# Altium PCB Radio_batt_testboard.PcbDoc
Units mil, origin at the board's own origin, x right, y up, seen from the top; angles counter-clockwise.
Board outline 6000.09 x 4000.19 mil, 2 copper layers (Top Layer, Bottom Layer); 55 components, 264 nets, 429 pads, 143 vias.
Unrouted connection lines stored in the file: 17.
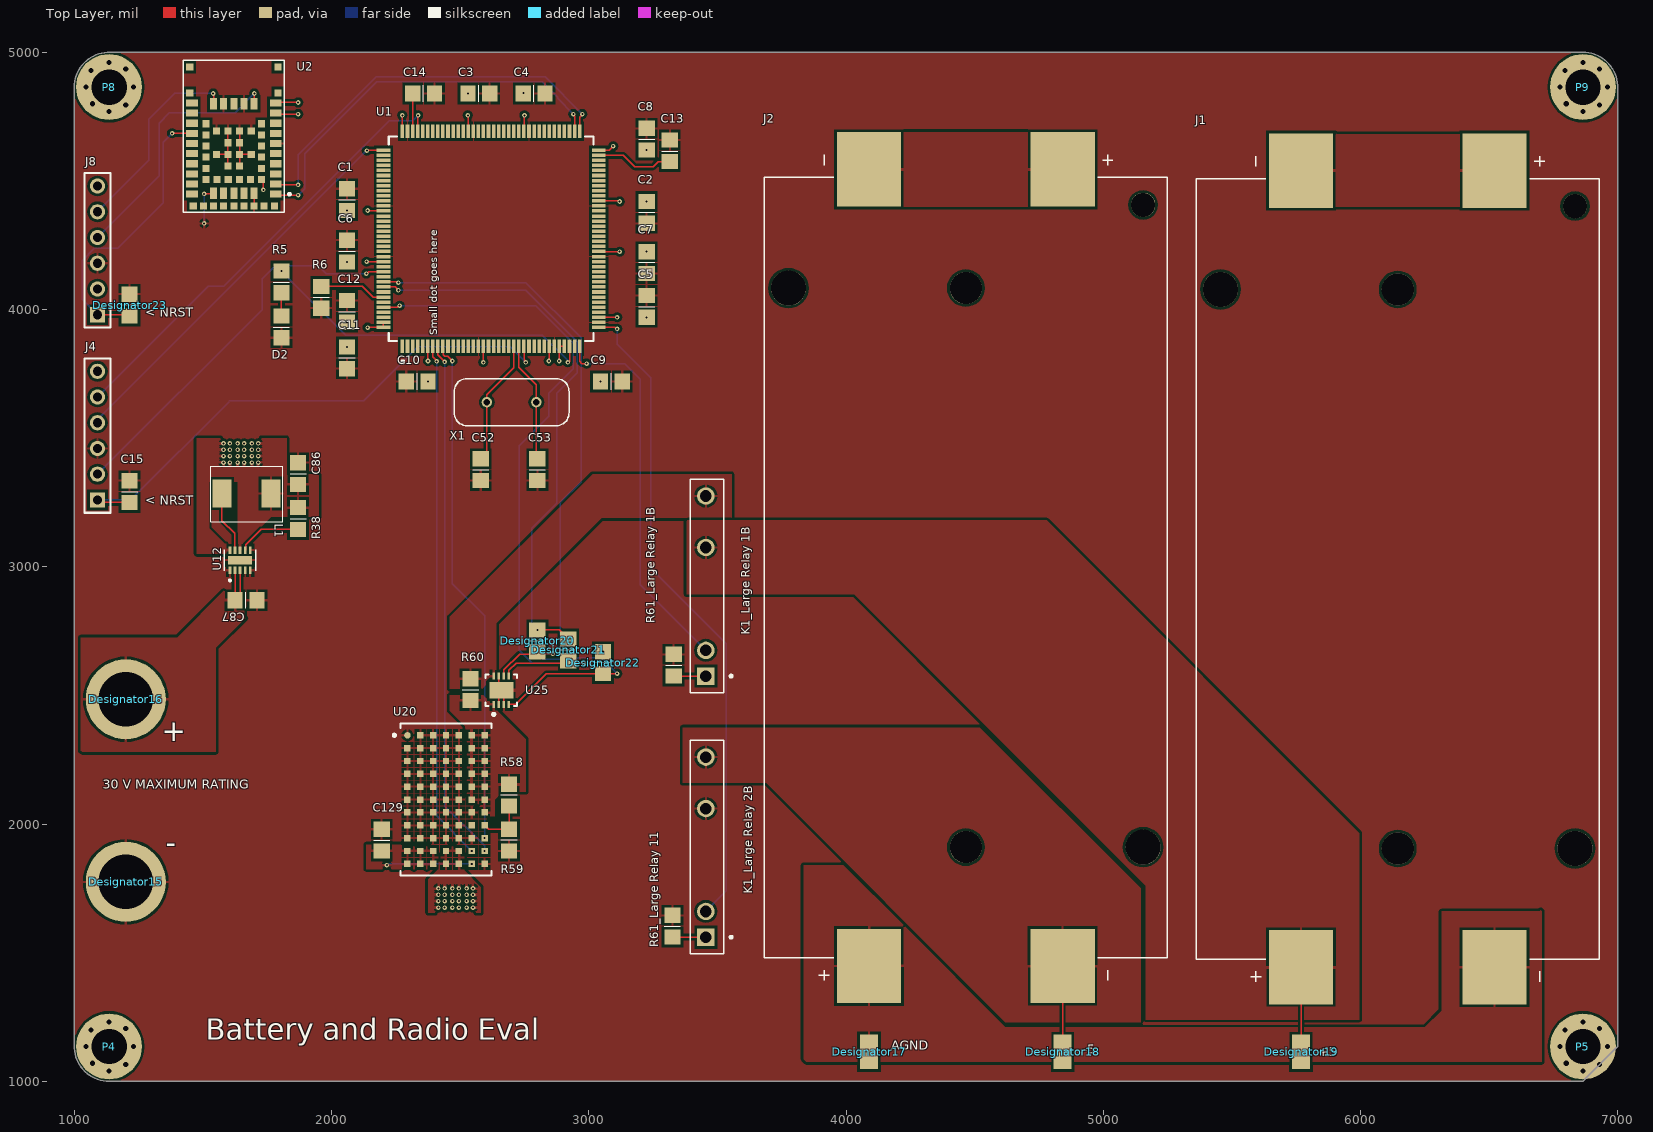
[diagram p0: Top Layer view]
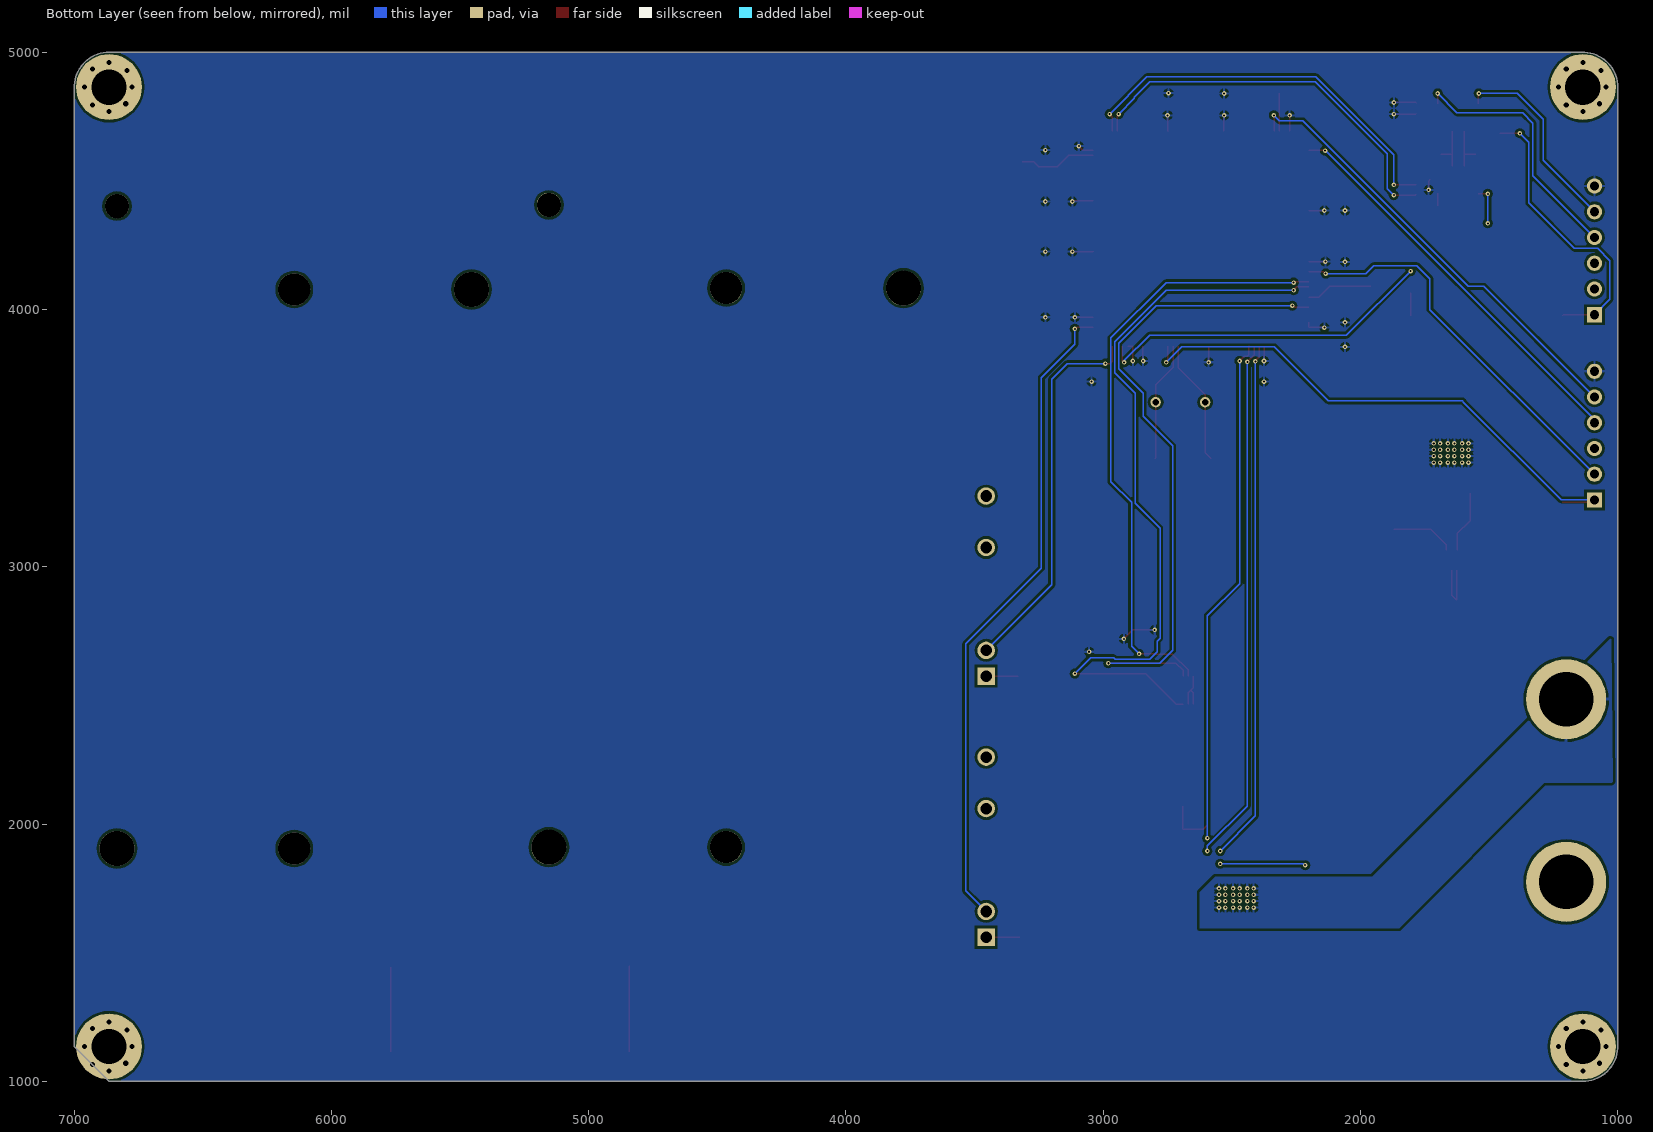
[diagram p1: Bottom Layer view, seen from below]
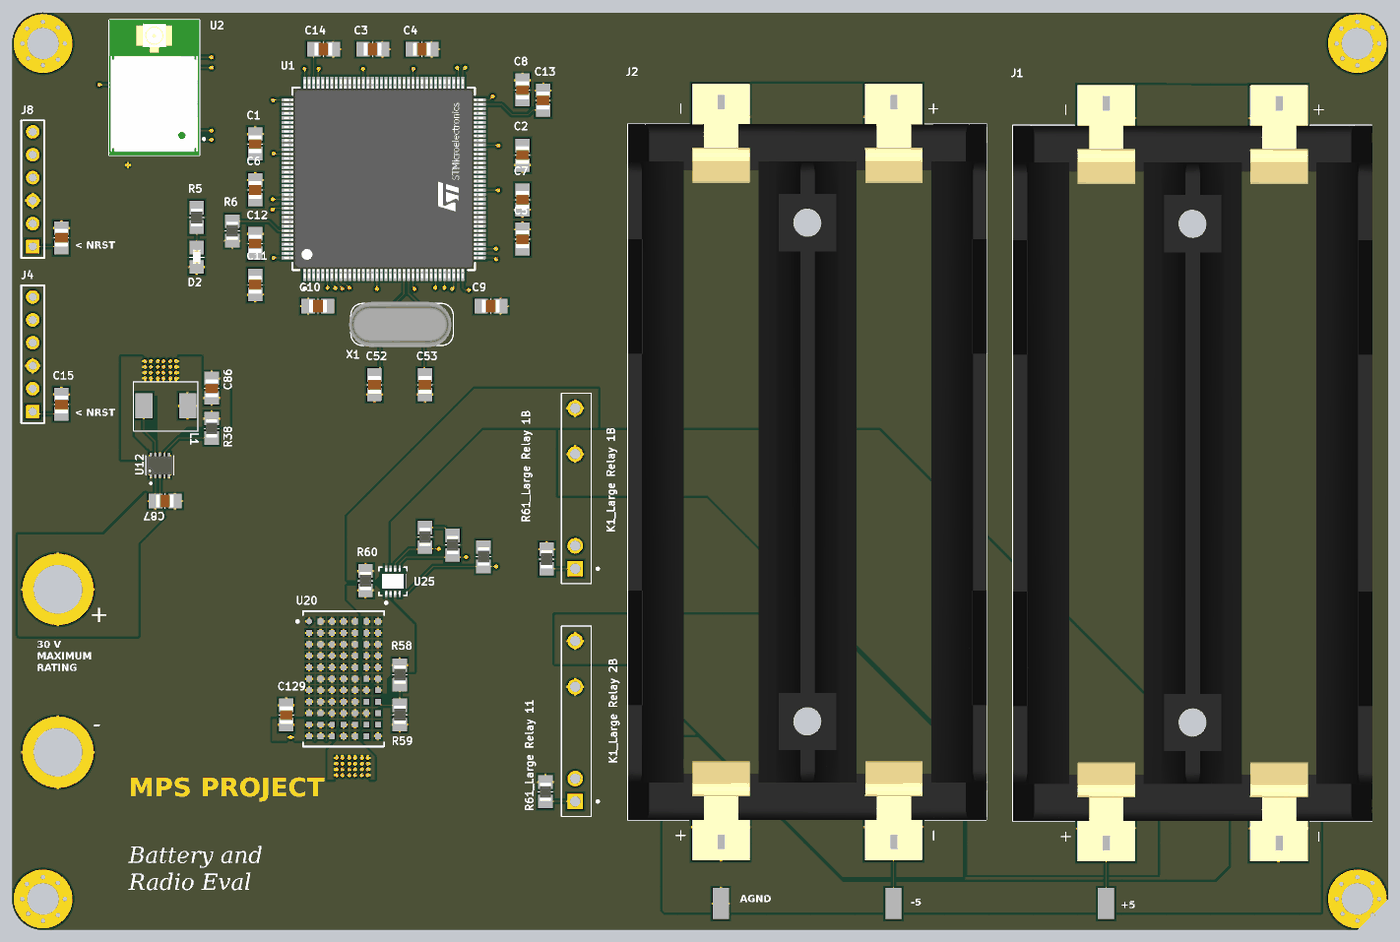
[diagram p2: 3D render of the assembled board from above, using the file's embedded part models]

## Layer stack, top to bottom
Top Solder: solder mask 0.4, Solder Resist, Dk 3.5
Top Layer: signal copper 1.4
Dielectric 1: dielectric 12.6, FR-4, Dk 4.8
Bottom Layer: signal copper 1.4
Bottom Solder: solder mask 0.4, Solder Resist, Dk 3.5

## Board outline
1135,999.91 cw(c1135,1135) 1000,1140 1000,4864.91 999.91,4865 cw(c1135,4865) 1140,5000 6864.91,5000 6865,5000.09 cw(c6865,4865) 7000,4860 7000,1135.09 6864.91,1000

## Design rules (kind name [scope] priority, off if disabled: settings)
Clearance [All] p1: gap=10 ignorepadtopadclearanceinfootprint=TRUE except(0: Arc-Hole Track-Hole SMDPad-Hole THPad-Hole Via-Hole Fill-Hole Poly-Hole Region-Hole Text-Hole)
PolygonConnect [All] p1: connectstyle=Relief reliefconductorwidth=10 reliefentries=4 polygonreliefangle="90 Angle" airgapwidth=10
RoutingVias [All] p1: holewidth=28 width=50 viastyle="Through Hole" minholewidth=28 minwidth=50 maxholewidth=28 maxwidth=50
SolderMaskExpansion [All] p1: expansion=4 istentingtop=FALSE
Width [All] p1: maxlimit=10 minlimit=5 preferedwidth=5
30 further rules are at their usual default settings.

## Classes and differential pairs
channel class voltagesource: OPA5481 OPA5482
channel class Small_Relay: "Small Relay 1" "Small Relay 21" "Small Relay 22"
channel class mixer: MIXER1 MIXER2
channel class low_pass: LP1 LP2
channel class LO: LO1 LO2
channel class Large_Relay: "Large Relay 2" "Large Relay 11" "Large Relay 12" "Large Relay 13"
channel class ina: INA LO1_INA1 LO1_INA2 LO2_INA1 LO2_INA2
channel class high_pass: HP HP2
channel class dcshift: DC1 dcshift1 dcshift2
channel class amp: AMP1 AMP2
component class ZIF_Bridge: J J5
component class ZIF_Bridge_4: J6 J7
component class "uBlox Radio": J8 U2
component class top_level: J1 J2
component class "Small Relay 22": "K2_Small Relay 22"
component class "Small Relay 21": "K2_Small Relay 21"
component class "Small Relay 1": "K2_Small Relay 1"
component class MECH: P4 P5 P8 P9
component class MCU: C1 C2 C3 C4 C5 C6 C7 C8 C9 C10 C11 C12 C13 C14 C15 C52 C53 D2 J4 R5 R6 U1 X1
component class LP: U22
component class LP2: U21
component class "Large Relay 13": "K1_Large Relay 13"
component class "Large Relay 12": "K1_Large Relay 12"
component class "Large Relay 11": "K1_Large Relay 11" "R61_Large Relay 11"
component class Batt_charger: C129 R58 R59 R60 U20 U25
component class 3v3_Regulator: C86 C87 L1 R38 U12
component class -5v_Regulator: U18

## Components (designator, comment, footprint, x,y, rotation, side; value= is the part's Value field where it differs from the comment)
C1 "0.1uF" STD_0805_C 2060,4469.65 r270 top value=.01uf
C2 "0.1uF" STD_0805_C 3225,4335.35 r90 top value=.01uf
C3 "0.1uF" STD_0805_C 2614.65,4840 r180 top value=.01uf
C4 "0.1uF" STD_0805_C 2829.65,4840 r180 top value=.01uf
C5 "0.1uF" STD_0805_C 3225,4054.65 r270 top value=.01uf
C6 "0.1uF" STD_0805_C 2060,4269.65 r270 top value=.01uf
C7 "0.1uF" STD_0805_C 3225,4140.35 r90 top value=.01uf
C8 "0.1uF" STD_0805_C 3225,4704.65 r270 top value=.01uf
C9 "0.1uF" STD_0805_C 3130,3720 r180 top value=.01uf
C10 "0.1uF" STD_0805_C 2290.35,3720 r0 top value=.01uf
C11 "0.1uF" STD_0805_C 2060,3770 r90 top value=.01uf
C12 "0.1uF" STD_0805_C 2060,4035 r270 top value=.01uf
C13 "4.7uF" STD_0805_C 3315,4659.65 r270 top value=.01uf
C14 "4.7uF" STD_0805_C 2400,4840 r180 top value=.01uf
C15 "1uF" STD_0805_C 1215,3334.65 r270 top value=.01uf
C52 "33pF" STD_0805_C 2580,3419.65 r270 top value=.01uf
C53 "33pF" STD_0805_C 2800,3419.65 r270 top value=.01uf
C86 "22uF" STD_0805_C 1870,3404.65 r270 top value=.01uf
C87 "22uF" STD_0805_C 1709.65,2870 r180 top value=.01uf
C129 "4.7uF" STD_0805_C 2195,1979.65 r270 top value=.01uf
D2 "LED" STD_LED 1805,3975 r270 top
Designator15 "Comment" 575-4 1200,1775 r0 top
Designator16 "Comment" 575-4 1200,2485 r0 top
Designator17 "Comment" 5017 4089.65,1115 r90 top
Designator18 "Comment" 5017 4842.01,1115 r90 top
Designator19 "Comment" 5017 5768.82,1115 r90 top
Designator20 "Comment" STD_0805_R 2800,2670 r90 top
Designator21 "Comment" STD_0805_R 2920,2635 r90 top
Designator22 "Comment" STD_0805_R 3055,2585 r90 top
Designator23 "Comment" STD_0805_C 1215,3975 r90 top
J1 "Batt Holder" SMD_Batteryholder 6145,2991.61 r90 top
J2 "Batt Holder" SMD_Batteryholder 4465.83,2996.61 r90 top
J4 "665306124022" HDR1X6 1090,3260 r90 top
J8 "665306124022" HDR1X6 1090,3980 r90 top
"K1_Large Relay 1B" "CPC1706Y" RELAY_CPC1706Y 3455,2575 r90 top (schematic designator K1)
"K1_Large Relay 2B" "CPC1706Y" RELAY_CPC1706Y 3455,1560 r90 top (schematic designator K1)
L1 "10uH" IHLP2020BZER100M01 1669.51,3285 r0 top
P4 "M3 Mounting Hole" MH-M3 1135,1135 r0 top
P5 "M3 Mounting Hole" MH-M3 6865,1135 r0 top
P8 "M3 Mounting Hole" MH-M3 1135,4865 r0 top
P9 "M3 Mounting Hole" MH-M3 6865,4865 r0 top
R5 "330" STD_0805_R 1805,4149.65 r270 top value=1K
R6 "10K" STD_0805_R 1960,4005.35 r90 top value=1K
R38 "100K" STD_0805_R 1870,3230 r270 top value=1K
R58 "1.24M" STD_0805_R 2690,2070 r90 top value=1K
R59 "312K" STD_0805_R 2690,1895 r90 top value=1K
R60 "50m" STD_0805_R 2540,2565 r270 top value=1K
"R61_Large Relay 1B" "360" STD_0805_R 3330,2659.65 r270 top value=1K (schematic designator R61)
"R61_Large Relay 11" "360" STD_0805_R 3325,1645 r270 top value=1K (schematic designator R61)
U1 "STM32F767ZIT6" FP-LQFP144-1A-MFG 2620,4275 r90 top
U2 "NINA-B400" NINA_LGA71R_1500X1000X223_UFL 1620,4673.03 r90 top
U12 "TPS62177DQCT" TPS62177 1644.37,3025.83 r90 top
U20 "LTM8062EV#PBF" LT-LGA-77-05-08-1856_V 2445,2095 r0 top
U25 "LTC2944IDD#PBF" FP-DD-8-05-08-1698-MFG 2660,2520 r90 top
X1 "8MHz 10ppm" XTAL_ECS-160-20-4X 2700,3640 r180 top

## Footprints (in the part's own frame and the unit in brackets; to place one, negate y for a bottom-side part, rotate by r counter-clockwise, add the part's x,y. Pads: shape width x height; smd on the part's side, far side on the other; paste and mask are expansions set on the pad)
575-4 [mm]
  round 7.9 hole 5.4: 1(0,0)
5017 [mil] "KEYSTONE TP GOLD"
  rect 135x70 smd: 1(0,0)
  body extent -60,-30 60,30, height 60
FP-DD-8-05-08-1698-MFG [mm]
  rect 0.7x0.25 smd paste+0 mask+0: 1(-1.4,0.75) 2(-1.4,0.25) 3(-1.4,-0.25) 4(-1.4,-0.75) 5(1.4,-0.75) 6(1.4,-0.25) 7(1.4,0.25) 8(1.4,0.75)
  rect 1.65x2.38 smd paste+0 mask+0: 9(0,0)
  silkscreen extent -2.5,-1.55 1.55,1.55, body extent -1.85,-1.65 1.85,1.65, height 0.25
FP-LQFP144-1A-MFG [mm]
  rect 1.35x0.35 smd paste+0 mask+0: 1(-10.625,8.75) 2(-10.625,8.25) 3(-10.625,7.75) 4(-10.625,7.25) 5(-10.625,6.75) 6(-10.625,6.25) 7(-10.625,5.75) 8(-10.625,5.25) 9(-10.625,4.75) 10(-10.625,4.25) 11(-10.625,3.75) 12(-10.625,3.25) 13(-10.625,2.75) 14(-10.625,2.25) 15(-10.625,1.75) 16(-10.625,1.25) 17(-10.625,0.75) 18(-10.625,0.25) 19(-10.625,-0.25) 20(-10.625,-0.75) 21(-10.625,-1.25) 22(-10.625,-1.75) 23(-10.625,-2.25) 24(-10.625,-2.75) 25(-10.625,-3.25) 26(-10.625,-3.75) 27(-10.625,-4.25) 28(-10.625,-4.75) 29(-10.625,-5.25) 30(-10.625,-5.75) 31(-10.625,-6.25) 32(-10.625,-6.75) 33(-10.625,-7.25) 34(-10.625,-7.75) 35(-10.625,-8.25) 36(-10.625,-8.75) 73(10.625,-8.75) 74(10.625,-8.25) 75(10.625,-7.75) 76(10.625,-7.25) 77(10.625,-6.75) 78(10.625,-6.25) 79(10.625,-5.75) 80(10.625,-5.25) 81(10.625,-4.75) 82(10.625,-4.25) 83(10.625,-3.75) 84(10.625,-3.25) 85(10.625,-2.75) 86(10.625,-2.25) 87(10.625,-1.75) 88(10.625,-1.25) 89(10.625,-0.75) 90(10.625,-0.25) 91(10.625,0.25) 92(10.625,0.75) 93(10.625,1.25) 94(10.625,1.75) 95(10.625,2.25) 96(10.625,2.75) 97(10.625,3.25) 98(10.625,3.75) 99(10.625,4.25) 100(10.625,4.75) 101(10.625,5.25) 102(10.625,5.75) 103(10.625,6.25) 104(10.625,6.75) 105(10.625,7.25) 106(10.625,7.75) 107(10.625,8.25) 108(10.625,8.75)
  rect 0.35x1.35 smd paste+0 mask+0: 37(-8.75,-10.625) 38(-8.25,-10.625) 39(-7.75,-10.625) 40(-7.25,-10.625) 41(-6.75,-10.625) 42(-6.25,-10.625) 43(-5.75,-10.625) 44(-5.25,-10.625) 45(-4.75,-10.625) 46(-4.25,-10.625) 47(-3.75,-10.625) 48(-3.25,-10.625) 49(-2.75,-10.625) 50(-2.25,-10.625) 51(-1.75,-10.625) 52(-1.25,-10.625) 53(-0.75,-10.625) 54(-0.25,-10.625) 55(0.25,-10.625) 56(0.75,-10.625) 57(1.25,-10.625) 58(1.75,-10.625) 59(2.25,-10.625) 60(2.75,-10.625) 61(3.25,-10.625) 62(3.75,-10.625) 63(4.25,-10.625) 64(4.75,-10.625) 65(5.25,-10.625) 66(5.75,-10.625) 67(6.25,-10.625) 68(6.75,-10.625) 69(7.25,-10.625) 70(7.75,-10.625) 71(8.25,-10.625) 72(8.75,-10.625) 109(8.75,10.625) 110(8.25,10.625) 111(7.75,10.625) 112(7.25,10.625) 113(6.75,10.625) 114(6.25,10.625) 115(5.75,10.625) 116(5.25,10.625) 117(4.75,10.625) 118(4.25,10.625) 119(3.75,10.625) 120(3.25,10.625) 121(2.75,10.625) 122(2.25,10.625) 123(1.75,10.625) 124(1.25,10.625) 125(0.75,10.625) 126(0.25,10.625) 127(-0.25,10.625) 128(-0.75,10.625) 129(-1.25,10.625) 130(-1.75,10.625) 131(-2.25,10.625) 132(-2.75,10.625) 133(-3.25,10.625) 134(-3.75,10.625) 135(-4.25,10.625) 136(-4.75,10.625) 137(-5.25,10.625) 138(-5.75,10.625) 139(-6.25,10.625) 140(-6.75,10.625) 141(-7.25,10.625) 142(-7.75,10.625) 143(-8.25,10.625) 144(-8.75,10.625)
  silkscreen extent -12.27,-10.1 10.1,10.1, body extent -11.4,-11.4 11.4,11.4, height 0.25
HDR1X6 [mm] "Connector; Header; 6 Position"
  rect 1.5x1.5 hole 0.9: 1(0,0)
  round 1.5 hole 0.9: 2(2.54,0) 3(5.08,0) 4(7.62,0) 5(10.16,0) 6(12.7,0)
  silkscreen extent -1.27,-1.27 13.97,1.27
IHLP2020BZER100M01 [mm]
  rect 1.905x2.79 smd: 1(-2.425,0) 2(2.426,0)
  silkscreen extent -3.56,-2.79 3.56,2.67, body extent -2.59,-2.55 2.59,2.55, height 2.54
LT-LGA-77-05-08-1856_V [mil] "LGA, 77-Leads, Body 15x9mm, Pitch 1.27mm"
  round 25 smd: A1(-150,250)
  rect 25x25 smd: A2(-100,250) A3(-50,250) A4(0,250) A5(50,250) A6(100,250) A7(150,250) B1(-150,200) B2(-100,200) B3(-50,200) B4(0,200) B5(50,200) B6(100,200) B7(150,200) C1(-150,150) C2(-100,150) C3(-50,150) C4(0,150) C5(50,150) C6(100,150) C7(150,150) D1(-150,100) D2(-100,100) D3(-50,100) D4(0,100) D5(50,100) D6(100,100) D7(150,100) E1(-150,50) E2(-100,50) E3(-50,50) E4(0,50) E5(50,50) E6(100,50) E7(150,50) F1(-150,0) F2(-100,0) F3(-50,0) F4(0,0) F5(50,0) F6(100,0) F7(150,0) G1(-150,-50) G2(-100,-50) G3(-50,-50) G4(0,-50) G5(50,-50) G6(100,-50) G7(150,-50) H1(-150,-100) H2(-100,-100) H3(-50,-100) H4(0,-100) H5(50,-100) H6(100,-100) H7(150,-100) J1(-150,-150) J2(-100,-150) J3(-50,-150) J4(0,-150) J5(50,-150) J6(100,-150) J7(150,-150) K1(-150,-200) K2(-100,-200) K3(-50,-200) K4(0,-200) K5(50,-200) K6(100,-200) K7(150,-200) L1(-150,-250) L2(-100,-250) L3(-50,-250) L4(0,-250) L5(50,-250) L6(100,-250) L7(150,-250)
  silkscreen extent -206,-295 177,295, body extent -177,-295 177,295, height 174
MH-M3 [mm]
  round 6.5 hole 3.5: 1(0,0)
NINA_LGA71R_1500X1000X223_UFL [mm] "Stand-alone Bluetooth low energy module"
  rect 0.7x1.15 smd paste+0 mask+0.05: 1(-5.7,-4.125) 2(-4.7,-4.125) 3(-3.7,-4.125) 4(-2.7,-4.125) 5(-1.7,-4.125) 6(-0.7,-4.125) 7(0.3,-4.125) 8(1.3,-4.125) 9(2.3,-4.125) 10(3.3,-4.125) 16(3.3,4.125) 17(2.3,4.125) 18(1.3,4.125) 19(0.3,4.125) 20(-0.7,4.125) 21(-1.7,4.125) 22(-2.7,4.125) 23(-3.7,4.125) 24(-4.7,4.125) 25(-5.7,4.125)
  rect 1.15x0.7 smd paste+0 mask+0.05: 11(3.225,-2) 12(3.225,-1) 13(3.225,0) 14(3.225,1) 15(3.225,2) 26(-5.625,2) 27(-5.625,1) 28(-5.625,0) 29(-5.625,-1) 30(-5.625,-2)
  rect 0.7x0.7 smd paste+0 mask+0.05: 31(-4.25,-2.75) 32(-3.15,-2.75) 33(-2.05,-2.75) 34(-0.95,-2.75) 35(0.15,-2.75) 36(1.25,-2.75) 37(1.25,2.75) 38(0.15,2.75) 39(-0.95,2.75) 40(-2.05,2.75) 41(-3.15,2.75) 42(-4.25,2.75) 43(-4.25,1.65) 44(-4.25,0.55) 45(-4.25,-0.55) 46(-4.25,-1.65) 47(-6.85,4) 48(-6.85,3) 49(-6.85,2) 50(-6.85,1) 51(-6.85,0) 52(-6.85,-1) 53(-6.85,-2) 54(-6.85,-3) 55(-6.85,-4) 56(-2.925,-0.575) 57(-2.925,0.575) 58(-1.775,-1.725) 59(-1.775,-0.575) 60(-1.775,0.575) 61(-1.775,1.725) 62(-0.625,-0.575) 63(-0.625,0.575) 64(0.525,-1.725) 65(0.525,-0.575) 66(0.525,0.575) 67(0.525,1.725) 68(4.3,-4.35) 69(6.85,-4.35) 70(6.85,4.35) 71(4.3,4.35)
  silkscreen extent -7.5,-5.6 7.5,5, body extent -7.5,-5 7.5,5, height 2.31
RELAY_CPC1706Y [mm]
  rect 1.725x1.725 hole 1.15: 1(0,0)
  round 1.725 hole 1.15: 2(2.54,0) 3(12.7,0) 4(17.78,0)
  silkscreen extent -1.65,-2.62 19.43,1.52
SMD_Batteryholder [mm]
  rect 7.34x6.35 smd: 1(-39.33,9.555) 2(39.33,-9.555) 3(-39.33,-9.555) 4(39.33,9.555)
  round 3.45 hole 3.45 unplated: ""(-27.6,-17.505) ""(27.6,17.505)
  round 3.17 hole 3.17 unplated: ""(-27.6,0) ""(27.6,0)
  round 2.39 hole 2.39 unplated: ""(35.82,-17.505)
  silkscreen extent -40.75,-19.89 40.75,19.89, body extent -43,-19.94 43,19.84, height 14.93
STD_0805_C [mm]
  rect 1.5x1.6 smd: 1(0,0) 2(2.15,0)
  silkscreen extent 1.1,-0.8 1.1,0.8, body extent 0.1,-0.72 2.1,0.73, height 1.22
STD_0805_R [mm]
  rect 1.5x1.6 smd: 1(0,0) 2(2.15,0)
  silkscreen extent 1.1,-0.8 1.1,0.8, body extent 0.1,-0.62 2.1,0.63, height 0.65
STD_LED [mm]
  rect 1.5x1.6 smd: 1(0,0) 2(2.15,0)
  silkscreen extent 1.1,-0.8 1.1,0.8, body extent 0.22,-0.4 1.82,0.4
TPS62177 [mm]
  rect 0.74x0.27 smd: 1(-0.995,1) 2(-0.995,0.5) 3(-0.995,0) 4(-0.995,-0.5) 5(-0.995,-1) 6(0.995,-1) 7(0.995,-0.5) 8(0.995,0) 9(0.995,0.5) 10(0.995,1)
  rect 0.84x2.4 smd: 1(0,0)
  silkscreen extent -2.1,-1.55 1.05,1.55, body extent -1,-1.5 1,1.5
XTAL_ECS-160-20-4X [mm]
  round 1.03 hole 0.63: 1(-2.44,0) 2(2.44,0)
  silkscreen extent -5.68,-2.33 5.68,2.33, body extent -5.47,-2.5 5.88,2.5, height 2.1

## Part data
C1 C2 C3 C4 C5 C6 C7 C8 C9 C10 C11 C12: library part CL21B104KACNNNC, "Capacitor, 0.1uF, 0805", MFGPN=CL21B104KACNNNC
C13 C14 C129: library part CL21A475KAQNNNE, "Capacitor, 4.7uF, 0805", MFGPN=CL21A475KAQNNNE
C15: library part CL21B105KBFNFNE, "Capacitor, 1uF, 0805", MFGPN=CL21B105KBFNFNE
C52 C53: library part CC0805GRNPO9BN330, "Capacitor, 33pF, 0805", MFGPN=CC0805GRNPO9BN330
C86 C87: library part GRM21BR61E226ME44L, "Capacitor, 22uF, 0805, 25V", MFGPN=GRM21BR61E226ME44L
D2: library part LNJ037X8ARA, "Typical LED", MFGPN=LNJ037X8ARA
J1 J2: library part 1048_Keystone_18650
J4 J8: library part 6pin_WE, "Connector Header Surface Mount 6 position 0.039 (1.00mm)", Package=None, Availability=Warning, Check_prices=https://www.snapeda.com/parts/665306124022/W%C3%BCrth%20Elektronik/view-part/1276936/?ref=eda, MF="WÃ¼rth Elektronik", MP=665306124022, Price=None, Purchase-URL=https://pricing.snapeda.com/search/part/665306124022/?ref=eda, SnapEDA_Link=https://www.snapeda.com/parts/665306124022/W%C3%BCrth%20Elektronik/view-part/1276936/?ref=snap
"K1_Large Relay 1B" "K1_Large Relay 2B": "Solid State SPST-NO _1 Form A_ 8-SIP, 4 Leads", Package="SIP-4 IXYS", Availability=Unavailable, MF="IXYS Integrated", MP=CPC1706Y, Price=None, SnapEDA_Link=https://www.snapeda.com/parts/CPC1706Y/IXYS%20Integrated%20Circuits%20Division/view-part/681572/?ref=snap
L1: library part IHLP2020BZER100M01, "Inductor 10uH VISHAY", MFGPN=IHLP2020BZER100M01
P4 P5 P8 P9: library part MH-M3
R5: library part RL1220S-R33-F, "330 1% 1/3W", MFGPN=RL1220S-R33-F
R6: library part RNCP0805FTD10K0, "10K 1% 1/4W", MFGPN=RNCP0805FTD10K0
R38: library part RR1220P-104-D, "100K 1% 1/10W", MFGPN=RR1220P-104-D
R58 R59 R60: library part RNCP0805FTD1K00, "1K 1% 1/4W", MFGPN=RNCP0805FTD1K00
"R61_Large Relay 1B" "R61_Large Relay 11": library part ERJ-PB6D7501V, "7.5K 1% 1/4W", MFGPN=ERJ-PB6D7501V
U1: library part CMP-12105-000074-1, "IC MCU 32BIT 2MB FLASH 144LQFP", Ambient Temperature Range High=+85°C, Ambient Temperature Range Low=-40°C, Frequency=216MHz, Manufacturer=STMicroelectronics, Max Junction Temp=+105°C, Max Supply Voltage=3.6V, Min Supply Voltage=1.7V, Package=LQFP144-1A, Temperature="-40°C to +85°C", Automotive=No, Category=IC, ComponentLink2Description=Datasheet, ComponentLink2URL=https://www.st.com/resource/en/datasheet/stm32f767zi.pdf, Core Architecture="ARM Cortex-M7", Data Bus Width=32bits, Device Class L1="Integrated Circuits (ICs)", Device Class L2="Embedded Processors and Controllers", Device Class L3=Microcontrollers, Digikey Description="IC MCU 32BIT 2MB FLASH 144LQFP", Height=1.6mm, Interface=I2C,SPI,UART,USART,EBI/EMI,CAN,USB,LIN,IrDA,Ethernet,I2S, Ipc Land Pattern Name=QFP50P2200X2200X160-144, Lead Free=Yes, Manufacturer Part Number=STM32F767ZIT6, Memory Size=2048KBytes, Memory Type=FLASH, Mouser Description="ARM Microcontrollers - MCU High-performance and DSP with FPU, ARM Cortex-M7 MCU with 2 Mbytes Flash, 216 MHz CPU, Art Accelerator, L1 cache, SDRAM,", Number Of A/D Converters=3, Number Of Adc Channels=24, Number Of Cores=1, Number Of Ethernet Channels=1, Number Of I2C Channels=4, Number Of I/Os=114, Number Of Pwm Channels=4, Number Of Spi Channels=6, Number Of Timers/Counters=15, Number Of Uart Channels=4, Number Of Usb Channels=1, Octopart=https://octopart.com/stm32f767zit6-stmicroelectronics-70527068, Ram Size=512KBytes, RoHS=TRUE, Standoff Height=0.05mm, Temperature Range High=+85°C, Temperature Range Low=-40°C
U2: "u-blox NINA-B400 Bluetooth 5 LE, 802.15.4 module", Manufacturer=u-blox, Part Description="Stand-alone Bluetooth low energy module"
U20: library part CMP-0483-00148-1, "32 VIN, 2 A uModule Power Tracking Battery Charger, 77-pin LGA, -40 to 125 degC, Pb-Free, Tray", Extended Temp="E, I", Frequency(kHz)=1000, Manufacturer="Linear Technology", Output Current(A)=2, Switch Current(A)=3, ComponentLink1Description="Manufacturer URL", ComponentLink1URL=http://www.linear.com/, ComponentLink2Description=Datasheet, ComponentLink2URL=http://cds.linear.com/docs/en/datasheet/8062fc.pdf, ComponentLink3Description="Package Specification", ComponentLink3URL=http://cds.linear.com/docs/en/packaging/05081856_B_lga77.pdf, DatasheetVersion="Rev. C", Ishutdown(uA)=15, Isupply(mA)=0.085, Mounting Technology="Surface Mount", Number of Outputs=1, PackageDescription="77-Pin LGA, Body 15 x 9 mm, Pitch 1.27 mm", PackageReference=LGA-77, PackageVersion="Rev. B, 01/2013", Packing=Tray, PartNumber=LTM8062EV#PBF, RoHS=TRUE, Synchronous=no, Topology=Buck, Tracking=no, Vin Max(V)=32, Vin Min(V)=4.95, Vout Max(V)=14.4, Vout Min(V)=3.3
U25: library part CMP-09132-000003-1, "IC BATTERY GAS GAUGE I2C 8DFN", Ambient Temperature Range High=+85°C, Ambient Temperature Range Low=-40°C, Manufacturer="Analog Devices", Max Supply Voltage=60V, Min Supply Voltage=3.6V, Nominal Supply Current=15-850uA, Package=DD-8-05-08-1698, Temperature="-40°C to +85°C", Automotive=No, Category=IC, ComponentLink2Description=Datasheet, ComponentLink2URL=https://www.analog.com/media/en/technical-documentation/data-sheets/2944fa.pdf, Device Class L1="Integrated Circuits (ICs)", Device Class L2="Power Management ICs", Device Class L3="Battery Management", Digikey Description="IC BATTERY GAS GAUGE I2C 8DFN", Height=0.8mm, Ipc Land Pattern Name=DFN300X300X75-8, Lead Free=Yes, Manufacturer Part Number=LTC2944IDD#PBF, Mouser Description="LTC2944 - 60V Battery Gas Gauge with Temperature, Voltage and Current Measurement", Number Of Cells=1, Number of Outputs=1, Octopart=https://octopart.com/ltc2944idd%23pbf-analog+devices-88318751, RoHS=TRUE, Standoff Height=0mm, Temperature Range High=+85°C, Temperature Range Low=-40°C
X1: library part 9B-8.000MEEJ-B

## Via types
v1: diameter 17.72, hole 7.87, Top Layer to Bottom Layer, 111 vias
v2: diameter 19.68, hole 19.68, Top Layer to Bottom Layer, 32 vias

## Nets (pads, with @x,y where several pads share a name; then routed paths per layer and width w, separated by ;. In a path a pad name is that pad's centre, name@x,y a point inside that pad or via, vN(x,y) a via of type N, cw(c..) or ccw(c..) an arc to the next point about the centre after c; other vN are vias at no path point)
1V8: 
2V5: 
3v3: C1.2 C2.2 C3.2 C4.2 C5.2 C6.2 C7.2 C8.2 C9.2 C10.2 C11.2 C12.2 C86.2 Designator20.2 Designator21.2 Designator22.2 J4.6 J8.6 L1.2 R38.1 U1.6 U1.17 U1.30 U1.32 U1.33 U1.39 U1.52 U1.62 U1.72 U1.84 U1.95 U1.108 U1.121 U1.131 U1.143 U1.144 U2.9 U2.10 U2.31 U12.8 U12.10 | length 1306.8
  Top Layer w5: U2.31 1735,4498.98 v1(1735,4465) ; U2.9 1785.98,4760 v1(1870,4760) ; U2.10 1784.45,4805 v1(1870,4805) ; v1(2136.12,4186.12) 2201.4,4186.12 U1.131 ; v1(2140,3930) 2140.26,3930.26 2201.44,3930.26 U1.144 U1.143 ; v1(2140,4385) 2141.44,4383.56 2201.4,4383.56 U1.121 ; v1(2275,4755) 2275.26,4754.74 2275.26,4693.56 U1.108 ; U1.6 2374.23,3856.4 2374.23,3800.77 v1(2375,3800) ; v1(2530,4755) 2531.12,4753.88 2531.12,4693.6 U1.95 ; v1(2590,3795) 2590.18,3795.18 2590.18,3856.4 U1.17 ; C4.2 v1(2746.25,4841.25) ; U1.84 2748.25,4693.6 2748.25,4753.25 v1(2750,4755) ; v1(2800,2754.65) 2885,2754.65 v1(2920,2719.65) ; v1(2845,3800) 2846.08,3801.08 2846.08,3856.4 U1.30 ; v1(2885,3800) 2885.45,3800.45 U1.32@2885.45,3856.4 ; U1.32 U1.32@2885.45,3856.4 ; U1.33 2905.14,3856.4 U1.32@2885.45,3856.4 ; U1.39 3038.37,3969.94 3109.94,3969.94 v1(3110,3970) ; U1.52 3038.6,4225.49 3119.51,4225.49 v1(3120,4225) ; U1.62 3038.6,4422.34 3117.66,4422.34 v1(3120,4420) ; U1.72 3079.49,4619.49 v1(3095,4635)
  other v1: 3055,2669.65 1580,3405 1605,3405 1635,3405 1660,3405 1690,3405 1715,3405 1580,3430 1605,3430 1635,3430 1660,3430 1690,3430 1715,3430 1580,3455 1605,3455 1635,3455 1660,3455 1690,3455 1715,3455 1580,3480 1605,3480 1635,3480 1660,3480 1690,3480 1715,3480 2375,3720 3045.35,3720 2060,3854.65 2060,3950.35 3225,3970 2060,4185 3225,4225 2060,4385 3225,4420 3225,4620 2530,4840
3v3_2: 
5V: 
5V_2: 
24V_548: 
-5V: 
-5V_2: 
-24V: 
-24V_548: 
ADC_CONV: U1.43
ADC_SCK: U1.41
ADC_SDO: U1.42
AGND: Designator17.1 J1.3 J2.1
AGND_2: 
ALCC: Designator20.1 U1.135 U25.6 | length 2372.5
  Top Layer w5: U1.135 2201.99,4107.38 2257.62,4107.38 v1(2260,4105) ; U25.6 2669.84,2598.88 2730.96,2660 2800,2660 2801.36,2661.36 v1(2860,2661.36)
  Bottom Layer w5: v1(2260,4105) 2755,4105 2970,3890 2970,3330.68 2890,3250.68 2890,2691.36 v1(2860,2661.36)
B\U\S\Y\: U1.40
C\S\_A: U1.46
C\S\_B: U1.47
C\S\_LO1: 
C\S\_LO2: 
CHRG: U1.8 U20.K7 | length 2037
  Top Layer w5: U1.8 2413.6,3856.4 2413.6,3823.41 2439.87,3797.14 v1(2439.87,3796.27)
  Bottom Layer w5: v1(2439.87,3796.27) 2439.87,2069.92 2595,1914.79 v1(2595,1895)
CLK_MODE_SEL_LO1: 
CLK_MODE_SEL_LO2: 
DGND: 
DVDD: 
FAULT: U1.9 U20.J7 | length 1985.7
  Top Layer w5: U1.9 2433.29,3856.4 2433.29,3824.94 2440.61,3817.62 2452.38,3817.62 v1(2470,3800)
  Bottom Layer w5: v1(2470,3800) 2470,2935 2595,2810 v1(2595,1945)
GND: "K1_Large Relay 2B.3" "R61_Large Relay 1B.1" "R61_Large Relay 11.1" C1.1 C2.1 C3.1 C4.1 C5.1 C6.1 C7.1 C8.1 C9.1 C10.1 C11.1 C12.1 C13.1 C14.1 C15.1 C52.2 C53.2 C86.1 C87.1 C129.1 D2.2 Designator15.1 Designator23.2 J4.3 J8.3 R6.1 R59.1 U1.16 U1.31 U1.38 U1.51 U1.61 U1.83 U1.94 U1.107 U1.120 U1.130 U2.6 U2.12 U2.14 U2.26 U2.30 U2.53 U2.56 U2.57 U2.58 U2.59 U2.60 U2.61 U2.62 U2.63 U2.64 U2.65 U2.66 U2.67 U12.1 U12.4 U12.5 U12.6 U20.A1 U20.A2 U20.A3 U20.A4 U20.A5 U20.B1 U20.B2 U20.B3 U20.B4 U20.B5 U20.C1 U20.C2 U20.C3 U20.C4 U20.C5 U20.D1 U20.D2 U20.D3 U20.D4 U20.D5 U20.E1 U20.E2 U20.E3 U20.E4 U20.E5 U20.F1 U20.F2 U20.F3 U20.F4 U20.F5 U20.G1 U20.G2 U20.G3 U20.G4 U20.G5 U20.G6 U20.H1 U20.H2 U20.H3 U20.H4 U20.H5 U20.J1 U20.J2 U20.J3 U20.J4 U20.J5 U20.J6 U20.L7 U25.2 U25.3 U25.7 U25.9 | length 739.9
  Top Layer w5: v1(1505,4450) 1539.68,4450 U2.26 ; U2.61 U2.60 ; U2.57 U2.60 ; U2.66 U2.63 U2.60 ; U2.56 U2.59 ; U2.65 U2.62 U2.59 ; U2.58 U2.59 ; U2.53 U2.30 ; U25.2 2650.16,2510.16 U25.9 ; U25.7 2650.16,2529.84 U25.9 ; U25.3 2669.84,2510.16 U25.9
  Bottom Layer w5: v1(1505,4335) v1(1505,4450)
GND_2: 
IO_UPDATE_A: U1.117
IO_UPDATE_B: U1.80
IO_UPDATE_LO1: 
IO_UPDATE_LO2: 
NetC13_2: C13.2 U1.71 | length 303.5
  Top Layer w5: U1.71 3038.6,4599.51 3133.94,4599.51 3178.44,4555 3250,4555 3270,4575 C13.2
NetC14_2: C14.2 U1.106 | length 146.9
  Top Layer w5: U1.106 2314.88,4839.53 C14.2
NetC28_HP2_1: 
NetC28_HP2_2: 
NetC28_HP_1: 
NetC28_HP_2: 
NetC29_HP2_2: 
NetC29_HP_2: 
NetC38_LP1_1: 
NetC38_LP1_2: 
NetC38_LP2_1: 
NetC38_LP2_2: 
NetC39_LP1_1: 
NetC39_LP1_2: 
NetC39_LP2_1: 
NetC39_LP2_2: 
NetC40_LP1_2: 
NetC40_LP2_2: 
NetC41_LP1_2: 
NetC41_LP2_2: 
NetC48_2: 
NetC50_1: 
NetC50_2: 
NetC52_1: C52.1 U1.23 X1.2 | length 490.3
  Top Layer w5: C52.1 2603.94,3443.58 2603.94,3668.94 2708.29,3773.29 2708.29,3856.4 U1.23
NetC53_1: C53.1 U1.24 X1.1 | length 466.8
  Top Layer w5: U1.24 2728.56,3856.4 2728.56,3774.87 2796.06,3707.37 X1.1 2796.06,3423.58 C53.1
NetC83_LO1_1: 
NetC83_LO2_1: 
NetC90_2: 
NetC94_1: 
NetC98_1: 
NetC99_1: 
NetC99_2: 
NetC100_2: 
NetC105_1: 
NetC105_2: 
NetC106_2: 
NetC111_1: 
NetC111_2: 
NetC112_2: 
NetC117_1: 
NetC117_2: 
NetC118_2: 
NetC123_1: 
NetC123_2: 
NetC124_2: 
NetC129_2: C129.2 U20.K1 U20.K2 U20.K3 U20.L1 U20.L2 U20.L3 U20.L6 | length 332.1
  Bottom Layer w5: v1(2215,1840) 2218.44,1840 2223.44,1845 v1(2545,1845)
NetD1_2: 
NetD2_1: D2.1 R5.2 | length 90
  Top Layer w5: D2.1 R5.2
NetD3_OPA5481_2: 
NetD3_OPA5482_2: 
NetJ1_1: "K1_Large Relay 1B.3" Designator19.1 J1.1 | length 328.2
  Top Layer w5: Designator19.1 J1.1
NetJ1_2: J1.2 J1.4
NetJ2_2: J2.2 J2.4
NetJ2_3: "K1_Large Relay 2B.4" Designator18.1 J2.3 | length 333.2
  Top Layer w5: Designator18.1 J2.3
NetJ5_01: 
NetJ5_02: 
NetJ5_25: 
NetJ5_26: 
NetJ5_27: 
NetJ5_28: 
NetJ6_01: 
NetJ6_03: 
NetJ7_01: 
NetJ7_03: 
NetJ_01: U1.45
NetJ_02: U1.97
"NetK1_Large Relay 1_1": 
"NetK1_Large Relay 1_2": U1.44
"NetK1_Large Relay 1B_1": "K1_Large Relay 1B.1" "R61_Large Relay 1B.2" | length 125
  Top Layer w5: 3330,2575 3455,2575
"NetK1_Large Relay 1B_2": "K1_Large Relay 1B.2" U1.36 | length 1482.4
  Top Layer w5: U1.36 2964.49,3798.95 2973.44,3790 v1(2991.36,3790)
  Bottom Layer w5: v1(2991.36,3790) 3140,3790 3200,3730 3200,2930 3455,2675
"NetK1_Large Relay 1B_3": 
"NetK1_Large Relay 1B_4": "K1_Large Relay 1B.4" R60.1 U25.8
"NetK1_Large Relay 2_1": 
"NetK1_Large Relay 2_2": U1.98
"NetK1_Large Relay 2B_1": "K1_Large Relay 2B.1" "R61_Large Relay 11.2" | length 130.1
  Top Layer w5: 3325,1560.35 3454.65,1560.35 3455,1560
"NetK1_Large Relay 2B_2": "K1_Large Relay 2B.2" U1.37 | length 2548.2
  Top Layer w5: U1.37 3101.05,3930.51 3106.56,3925 v1(3110,3925)
  Bottom Layer w5: v1(3110,3925) 3110,3865 3240,3735 3240,2995 3535,2700 3535,1740 3455,1660
"NetK1_Large Relay 2B_4": 
"NetK1_Large Relay 11_1": 
"NetK1_Large Relay 11_2": 
"NetK1_Large Relay 11_4": 
"NetK1_Large Relay 12_1": 
"NetK1_Large Relay 12_2": 
"NetK1_Large Relay 12_3": 
"NetK1_Large Relay 12_4": 
"NetK1_Large Relay 13_1": 
"NetK1_Large Relay 13_2": 
"NetK2_Small Relay 21_1": U1.96
"NetK2_Small Relay 21_3": 
NetL1_1: L1.1 U12.9 | length 241
  Top Layer w5: L1.1 1574.02,3179.22 1623.64,3129.6 1623.64,3066.04 U12.9
NetP3_1: 
NetP12_1: 
NetP14_1: 
NetP14_2: 
NetP15_2: 
NetQ1_OPA5481_1: 
NetQ1_OPA5481_2: 
NetQ1_OPA5482_1: 
NetQ1_OPA5482_2: 
NetR1_1: 
NetR2_1: 
NetR2_2: 
NetR3_2: 
NetR5_1: R5.1 U1.34 | length 1331.6
  Top Layer w5: v1(2918.64,3795) 2922.08,3795 v1@2925.01,3797.93 ; v1@2925.06,3797.93 2925.06,3856.63 U1.34
  Bottom Layer w5: v1(1805,4149.65) 2054.65,3900 2820,3900 2919.75,3800.25 2918.64,3799.14 v1(2918.64,3795)
NetR6_2: R6.2 U1.138 | length 258.8
  Top Layer w5: R6.2 2120,4090 2161.38,4048.62 U1.138
NetR7_INA_1: 
NetR7_INA_2: 
NetR7_LO1_INA1_1: 
NetR7_LO1_INA1_2: 
NetR7_LO1_INA2_1: 
NetR7_LO1_INA2_2: 
NetR7_LO2_INA1_1: 
NetR7_LO2_INA1_2: 
NetR7_LO2_INA2_1: 
NetR7_LO2_INA2_2: 
NetR8_AMP1_1: 
NetR8_AMP2_1: 
NetR8_AMP2_2: 
NetR10_HP_2: 
NetR17_1: 
NetR18_1: 
NetR19_LO1_1: 
NetR19_LO2_1: 
NetR20_DC1_1: 
NetR20_dcshift1_1: 
NetR20_dcshift2_1: 
NetR22_DC1_3: 
NetR22_dcshift1_3: 
NetR22_dcshift2_3: 
NetR24_OPA5481_1: 
NetR24_OPA5482_1: 
NetR25_OPA5481_1: 
NetR25_OPA5481_2: 
NetR25_OPA5482_1: 
NetR25_OPA5482_2: 
NetR27_LO1_1: 
NetR27_LO2_1: 
NetR28_LO1_1: 
NetR28_LO2_1: 
NetR29_LO1_1: 
NetR29_LO2_1: 
NetR30_LO1_2: 
NetR30_LO2_2: 
NetR31_LO1_1: 
NetR31_LO2_1: 
NetR32_LO1_2: 
NetR32_LO2_2: 
NetR33_LO1_2: 
NetR33_LO2_2: 
NetR35_LO1_1: 
NetR35_LO2_1: 
NetR38_2: R38.2 U12.7 | length 249.7
  Top Layer w5: U12.7 1665.93,3066.87 1665.93,3084.74 1726.54,3145.35 R38.2
NetR39_1: 
NetR40_1: 
NetR43_1: 
NetR45_1: 
NetR54_1: 
NetR56_1: 
NetR58_1: R58.1 R59.2 U20.H7 | length 191.7
  Top Layer w5: U20.H7 2610.35,1979.65 R59.2 R58.1
NetR58_2: R58.2 R60.2 U20.A6 U20.A7 U20.B6 U20.B7 U20.C6 U20.C7 U20.D6 U20.D7 U20.E6 U20.E7 U20.F6 U20.F7 U20.G7 U25.1
NetS2_MIXER1_2: 
NetS2_MIXER1_5: 
NetS2_MIXER2_2: 
NetS2_MIXER2_5: 
NetU14_MIXER1_15: 
NetU14_MIXER2_15: 
NetU20_J7: 
NetU20_K6: 
NetU20_K7: 
NetU21_6: 
NetU22_6: 
NetU23_6: 
NetU25_5: 
NetU25_6: 
NRST: C15.2 J4.1 U1.25 | length 2131.3
  Top Layer w5: J4.1 1100,3250 C15.2 ; U1.25 2748.25,3856.4 2748.25,3805.19 2755,3798.44 v1(2755,3795)
  Bottom Layer w5: J4.1 1220,3260 1600,3640 1600,3642.07 1602.93,3645 2125,3645 2335,3855 2695,3855 v1(2755,3795)
P0_A: U1.118
P0_B: U1.81
P0_LO1: 
P0_LO2: 
P1_A: U1.119
P1_B: U1.82
P1_LO1: 
P1_LO2: 
P2_A: U1.122
P2_B: U1.85
P2_LO1: 
P2_LO2: 
P3_A: U1.123
P3_B: U1.86
P3_LO1: 
P3_LO2: 
RADIO_NRST: Designator23.1 J8.1 U2.19 | length 1132.3
  Top Layer w5: J8.1 1210,3980 Designator23.1 ; v1(1380,4685) 1457.44,4685 U2.19
  Bottom Layer w5: J8.1 1030,4040 1030,4190 1077.97,4237.97 1167.97,4237.97 1345,4415 1345,4650 v1(1380,4685)
RADIO_RX: U1.74 U2.1 | length 1543.8
  Top Layer w5: U2.1 1786.02,4445 v1(1870,4445) ; v1(2940,4760) 2940,4756.56 2944.8,4751.76 U1.74
  Bottom Layer w5: v1(1870,4445) 1895,4470 1895,4605 2175,4885 2820,4885 2878.78,4826.22 2878.78,4821.22 v1(2940,4760)
RADIO_SWCLK: J8.4 U2.11 | length 1002.6
  Top Layer w5: U2.11 1700,4801.26 v1(1700,4840)
  Bottom Layer w5: J8.4 1330,4520 1330,4725 1370,4765 1625,4765 v1(1700,4840)
RADIO_SWDIO: J8.5 U2.15 | length 775.1
  Top Layer w5: v1(1540,4840) 1539.57,4839.57 1539.57,4835.43 1541.26,4833.74 U2.15
  Bottom Layer w5: J8.5 1290,4580 1290,4740 1390,4840 v1(1540,4840)
RADIO_TX: U1.73 U2.2 | length 1567
  Top Layer w5: U2.2 1785.39,4485 v1(1870,4485) ; U1.73 2964.49,4747.38 2975,4757.89 v1(2975,4760)
  Bottom Layer w5: v1(1870,4485) 1870,4601.21 2173.79,4905 2830,4905 v1(2975,4760)
REF: 
RESET_A: U1.116
RESET_B: U1.79
RESET_LO1: 
RESET_LO2: 
RUN: U1.7 U20.K6 | length 2024.4
  Top Layer w5: U1.7 2393.62,3816.38 2408.51,3801.49 v1(2408.51,3798.3)
  Bottom Layer w5: v1(2408.51,3798.3) 2408.51,2031.49 v1(2545,1895)
SCL: Designator22.1 U1.136 U25.4 | length 2955
  Top Layer w5: U1.136 2201.99,4087.7 2247.3,4087.7 v1(2260,4075) ; U25.4 2715.12,2464.88 2835.24,2585 Designator22.1 v1(3110,2585)
  Bottom Layer w5: v1(2260,4075) 2755,4075 2955,3875 2955,3755 2875,3675 2875,3246.89 2778.64,3150.53 2778.64,2722.43 2790,2711.07 2790,2670 2820,2640 2953.17,2640 2959.53,2646.36 3048.64,2646.36 v1(3110,2585)
SCLK: U1.69
SCLK_LO1: 
SDA: Designator21.1 U1.140 U25.5 | length 2676.9
  Top Layer w5: U1.140 2201.99,4009.55 2256.11,4009.55 2261.56,4015 v1(2265,4015) ; U25.5 2689.53,2597.35 2717.17,2625 v1(2980,2625)
  Bottom Layer w5: v1(2265,4015) 2793.79,4015 2940,3868.79 2940,3770 2845,3675 2845,3585 2730,3470 2730,2675 2780,2625 v1(2980,2625)
SDIO_0: U1.27
SDIO_0_LO1: 
SDIO_1_A: U1.114
SDIO_1_B: U1.77
SDIO_1_LO1: 
SDIO_1_LO2: 
SDIO_2: U1.28
SDIO_2_LO1: 
SDIO_3_A: U1.115
SDIO_3_B: U1.78
SDIO_3_LO1: 
SDIO_3_LO2: 
SWCLK: J4.4 U1.109 | length 1557.3
  Top Layer w5: v1(2137.6,4617.4) 2139.4,4619.19 2201.4,4619.19 U1.109
  Bottom Layer w5: J4.4 1090,3571.56 2135,4616.56 2136.76,4616.56 v1(2137.6,4617.4)
SWDIO: J4.5 U1.105 | length 1762.2
  Top Layer w5: U1.105 2334.78,4693.52 2334.78,4753.54 v1(2336.24,4755)
  Bottom Layer w5: J4.5 1520.17,4090.17 1580.17,4090.17 2223.64,4733.64 2314.88,4733.64 v1(2336.24,4755)
SWO: J4.2 U1.133 | length 1533.7
  Top Layer w5: v1(2135,4140) 2138.44,4140 2145.19,4146.75 2201.4,4146.75 U1.133
  Bottom Layer w5: J4.2 1730,4000 1730,4120 1781,4171 1948.35,4171 1979.36,4140 v1(2135,4140)
USART1_RX: U1.76
USART1_TX: U1.75
USBDM: U1.103
USBDP: U1.104
VBUS: U1.101
VIN: C87.2 Designator16.1 U12.2 U12.3 U20.K4 U20.K5 U20.L4 U20.L5 | length 241.5
  Top Layer w5: U12.2 1624.69,2870.31 C87.2 1644.37,2889.37 U12.3
  other v1: 2415,1675 2440,1675 2470,1675 2495,1675 2525,1675 2550,1675 2415,1700 2440,1700 2470,1700 2495,1700 2525,1700 2550,1700 2415,1725 2440,1725 2470,1725 2495,1725 2525,1725 2550,1725 2415,1750 2440,1750 2470,1750 2495,1750 2525,1750 2550,1750
XTAL+_LO1: 
XTAL+_LO2: 
XTAL-_LO1: 
XTAL-_LO2: 
pads on no net: J1. J2. J8.2 P4.1 P5.1 P8.1 P9.1 U1.1 U1.2 U1.3 U1.4 U1.5 U1.10 U1.11 U1.12 U1.13 U1.14 U1.15 U1.18 U1.19 U1.20 U1.21 U1.22 U1.26 U1.29 U1.35 U1.48 U1.49 U1.50 U1.53 U1.54 U1.55 U1.56 U1.57 U1.58 U1.59 U1.60 U1.63 U1.64 U1.65 U1.66 U1.67 U1.68 U1.70 U1.87 U1.88 U1.89 U1.90 U1.91 U1.92 U1.93 U1.99 U1.100 U1.102 U1.110 U1.111 U1.112 U1.113 U1.124 U1.125 U1.126 U1.127 U1.128 U1.129 U1.132 U1.134 U1.137 U1.139 U1.141 U1.142 U2.3 U2.4 U2.5 U2.7 U2.8 U2.13 U2.16 U2.17 U2.18 U2.20 U2.21 U2.22 U2.23 U2.24 U2.25 U2.27 U2.28 U2.29 U2.32 U2.33 U2.34 U2.35 U2.36 U2.37 U2.38 U2.39 U2.40 U2.41 U2.42 U2.43 U2.44 U2.45 U2.46 U2.47 U2.48 U2.49 U2.50 U2.51 U2.52 U2.54 U2.55 U2.68 U2.69 U2.70 U2.71 U20.H6
copper on no net:
  other v2: 1135,1040 6865,1040 1200,1065 6930,1065 1070,1070 6800,1070 1045,1135 1230,1135 6775,1135 6960,1135 1065,1200 6795,1200 1200,1205 6930,1205 1135,1230 6865,1230 1135,4770 6865,4770 1200,4795 6930,4795 1070,4800 6800,4800 1045,4865 1230,4865 6775,4865 6960,4865 1065,4930 6795,4930 1200,4935 6930,4935 1135,4960 6865,4960

## Polygon pours and split planes (outlines as drawn)
GND on Top Layer "Top Layer-No Net1" (solid, pour order 17): 1135,999.91 cw(c1135,1135) 1000,1140 1000,4864.91 999.91,4865 cw(c1135,4865) 1140,5000 6864.91,5000 6865,5000.09 cw(c6865,4865) 7000,4860 7000,1135.09 6864.91,1000
AGND on Top Layer "AGND_L01_P009" (solid, pour order 9): 3990,1840 4620,1210 6250,1210 6315,1275 6315,1660 6695,1660 6700,1665 6705,1660 6705,1075 3845,1075 3835,1085 3835,1840
VIN on Top Layer "VIN_L01_P014" (solid, pour order 14): 2415,1920 2515,1920 2515,1820 2580,1755 2580,1655 2375,1655 2375,1785 2415,1825
NetC129_2 on Top Layer "NETC129_2_L01_P013" (solid, pour order 13): 2135,1920 2415,1920 2415,1825 2135,1825
3v3 on Top Layer "3V3_L01_P012" (solid, pour order 12): 1475,3500 1825,3500 1825,3360 1945,3360 1950,3355 1950,3195 1765,3195 1660,3090 1660,3050 1635,3050 1635,3330 1525,3330 1525,3150 1585,3090 1615,3090 1615,3050 1475,3050
no net on Top Layer "NONET_L01_P011" (solid, pour order 11): 1470,3480
VIN on Top Layer "VIN_L01_P010" (solid, pour order 10): 1025,2725 1025,2285 1030,2280 1550,2280 1550,2685 1665,2800 1660,2805 1660,2945 1644.37,2960.63 1644.37,2986.65 1624.69,2986.65 1620,2981.97 1620,2945 1400,2725
NetR58_2 on Top Layer "NETR58_2_L01_P008" (solid, pour order 8): 2460,2500 2590,2500 2620,2470 2635,2470 2635,2450 2755,2330 2755,2125 2665,2125 2635,2095 2635,2030 2575,2030 2570,2035 2570,2070 2520,2070 2520,2380 2460,2440
no net on Top Layer "NONET_L01_P006" (solid, pour order 6): 2380,2815
"NetK1_Large Relay 1B_4" on Top Layer "NETK1_LARGE_RELAY_1B_4_L01_P005" (solid, pour order 5): 2460,2525 2585,2525 2600,2540 2600,2555 2615,2570 2635,2570 2640,2575 2640,2780 3050,3190 3555,3190 3555,3360 3015,3360 2460,2805
NetJ1_2 on Top Layer "NETJ1_2_L01_P003" (solid, pour order 3): 5645,4685 5645,4400 6645,4400 6645,4680
NetJ2_2 on Top Layer "NETJ2_2_L01_P002" (solid, pour order 2): 3960,4690 3960,4400 4970,4400 4970,4690
NetJ1_1 on Top Layer "NETJ1_1_L01_P001" (solid, pour order 1): 3380,3180 4780,3180 5995,1965 5995,1240 5375,1240 5165,1240 5165,1760 4031.88,2893.12 3380.16,2893.12
NetJ2_3 on Top Layer "NETJ2_3_L01_P000" (solid, pour order 0): 3365,2160 3690,2160 4620,1230 5145,1230 5145,1750 4520,2375 3365,2375
3v3 on Bottom Layer "Top Layer-No Net" (solid, pour order 16): 1135,999.91 cw(c1135,1135) 1000,1140 1000,4864.91 999.91,4865 cw(c1135,4865) 1140,5000 6864.91,5000 6865,5000.09 cw(c6865,4865) 7000,4860 7000,1135.09 6864.91,1000
VIN on Bottom Layer "VIN_L02_P015" (solid, pour order 15): 1025,2725 1955,1795 2565,1795 2625,1735 2625,1595 1850,1595 1285,2160 1020,2160

## Silkscreen, mask and mechanical layers (free items; w line width, h text height)
Top Overlay:
  text "< NRST" at 1275,3960 h60
  text "Small dot goes here" at 2420,3900 h50 r90
  text "< NRST" at 1275,3230 h60
  text "+" at 1340,2295 h140
  text "30 V MAXIMUM RATING" at 1110,2125 h60
  text "-" at 1355,1860 h140
  text "Battery and Radio Eval" at 1510,1135 h140
  text "AGND" at 4175,1110 h60
  text "-5" at 4920,1095 h60
  text "+5" at 5835,1085 h60
Top Solder:
  text "MPS PROJECT" at 1510,1370 h160